# EAGLE board Z05_C6V_01 (EAGLE 6.3)
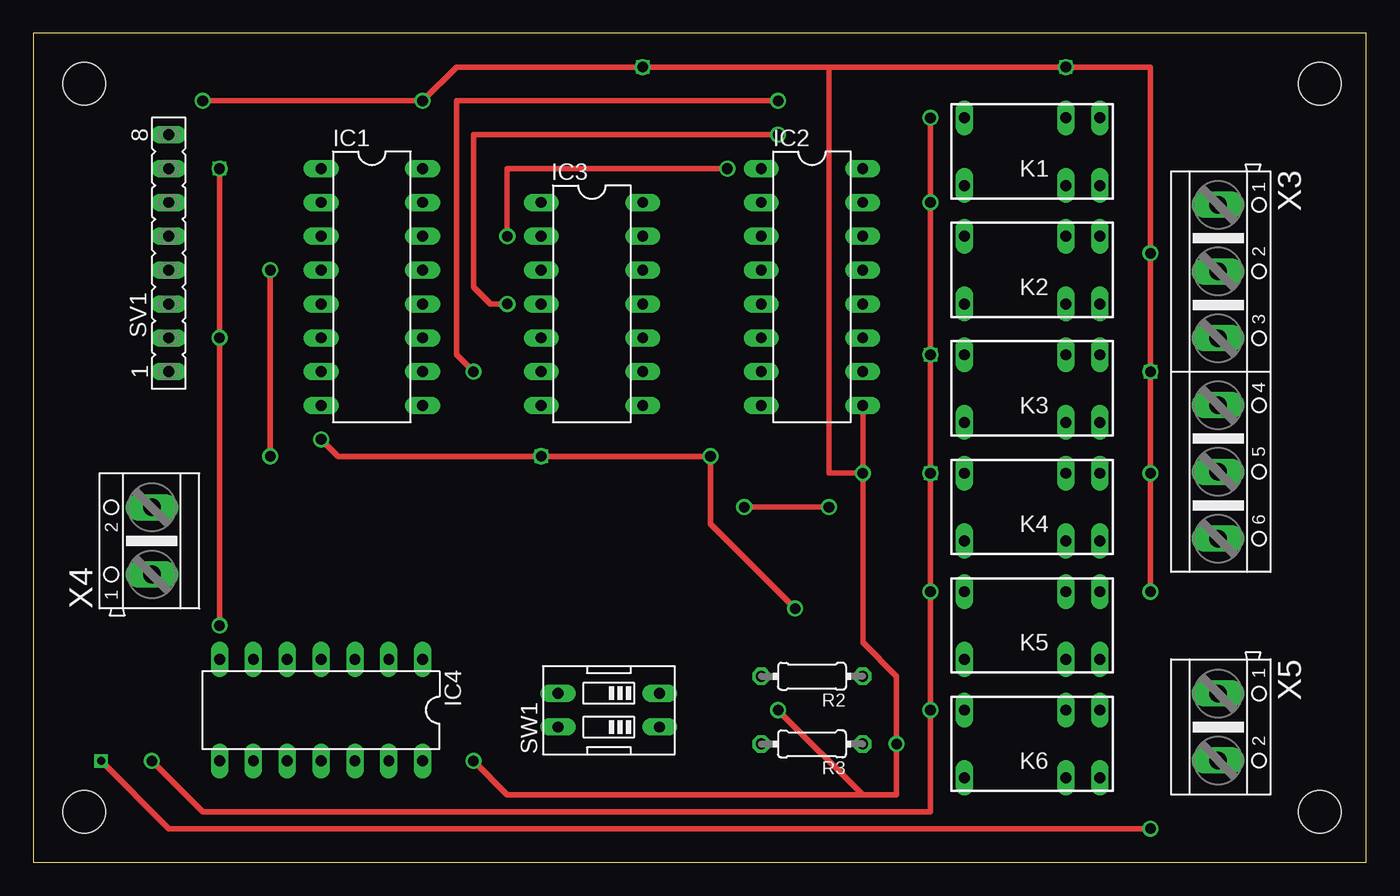
[diagram p0: board, top side]
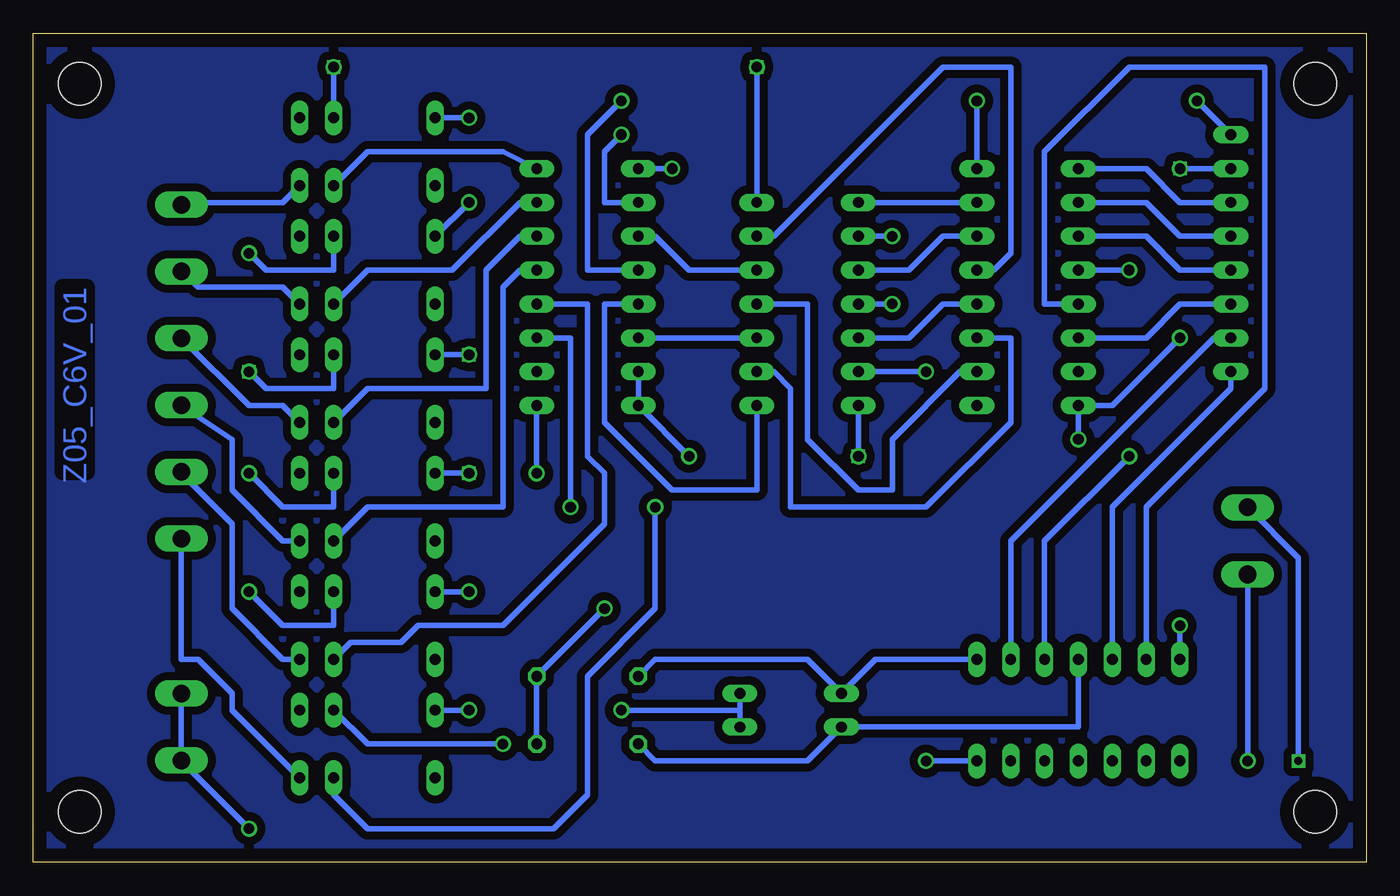
[diagram p1: board, bottom side, seen from below]

Size 100 x 62.22 mm. Coordinates in mm from the lower left corner, seen from the top.
Outline: 0,0 100,0 100,62.22 0,62.22 0,0
Copper layers (1*16): Top 0.035mm / dielectric 1.5mm / Bottom 0.035mm
Design rules "default *": minimum track width 16mil, minimum drill 24mil, track to track 24mil, track to pad 24mil, pad to pad 24mil, via to via 24mil, smd to smd 8mil, copper to edge 40mil, drill to drill 24mil, minimum pad ring 10mil, minimum via ring 8mil, stop-mask expansion 4mil, vias tented up to drill 0mil, thermal gap 10mil
Holes 3.2 mm at 3.81,58.42 96.52,58.42 3.81,3.81 96.52,3.81

## Footprints (pad centres in the part's own frame; a part is rotated, then mirrored left to right if it is on the bottom)
DIL16 = drill 0.813 long: 1 -8.89,-3.81; 2 -6.35,-3.81; 3 -3.81,-3.81; 4 -1.27,-3.81; 5 1.27,-3.81; 6 3.81,-3.81; 7 6.35,-3.81; 8 8.89,-3.81; 9 8.89,3.81; 10 6.35,3.81; 11 3.81,3.81; 12 1.27,3.81; 13 -1.27,3.81; 14 -3.81,3.81; 15 -6.35,3.81; 16 -8.89,3.81
DIL14 = drill 0.813 long: 1 -7.62,-3.81; 2 -5.08,-3.81; 3 -2.54,-3.81; 4 0,-3.81; 5 2.54,-3.81; 6 5.08,-3.81; 7 7.62,-3.81; 8 7.62,3.81; 9 5.08,3.81; 10 2.54,3.81; 11 0,3.81; 12 -2.54,3.81; 13 -5.08,3.81; 14 -7.62,3.81
G5V1 = drill 0.813 long: 1 -5.08,-2.54; 2 -2.54,-2.54; 5 5.08,-2.54; 6 5.08,2.54; 9 -2.54,2.54; 10 -5.08,2.54
0204/7 = drill 0.813 octagon: 1 -3.81,0; 2 3.81,0
FE08 = drill 0.813 long: 1 -8.89,0; 2 -6.35,0; 3 -3.81,0; 4 -1.27,0; 5 1.27,0; 6 3.81,0; 7 6.35,0; 8 8.89,0
EDG-02 = drill 0.813 long: 1 -1.27,-3.81; 2 1.27,-3.81; 3 1.27,3.81; 4 -1.27,3.81
AK500/6 = drill 1.321 long: 1 -12.522,0; 2 -7.518,0; 3 -2.515,0; 4 2.515,0; 5 7.518,0; 6 12.522,0
AK500/2 = drill 1.321 long: 1 -2.515,0; 2 2.515,0

## Placement (x,y rotation side)
IC1  74LS138N  [DIL16]  25.4,43.18 270 top
IC2  ULN2003AN  [DIL16]  58.42,43.18 270 top
IC3  74LS04N  [DIL14]  41.91,41.91 270 top
IC4  74LS86N  [DIL14]  21.59,11.43 180 top
K1  G5V1  [G5V1]  74.93,53.34 180 top
K2  G5V1  [G5V1]  74.93,44.45 180 top
K3  G5V1  [G5V1]  74.93,35.56 180 top
K4  G5V1  [G5V1]  74.93,26.67 180 top
K5  G5V1  [G5V1]  74.93,17.78 180 top
K6  G5V1  [G5V1]  74.93,8.89 180 top
R2  1K  [0204/7]  58.42,13.97 180 top
R3  1K  [0204/7]  58.42,8.89 180 top
SV1  Logic  [FE08]  10.16,45.72 90 top
SW1  BOARD SELECTOR  [EDG-02]  43.18,11.43 90 top
X3  Valves Control  [AK500/6]  88.9,36.83 270 top
X4  24VAC  [AK500/2]  8.89,24.13 90 top
X5  AC Common  [AK500/2]  88.9,10.16 270 top

## Library data of the parts
IC1 IC3 IC4 = 74xx-eu
IC2 = uln-udn
K1-K6 = relay; MPN: G5V-1-DC24; OC_FARNELL: 9949593; OC_NEWARK: 36M6377
R2 R3 = rcl
SV1 = con-lsta; OC_FARNELL: unknown; OC_NEWARK: unknown
SW1 = special
X3-X5 = con-ptr500; OC_FARNELL: unknown; OC_NEWARK: unknown

## Nets
GND: IC1.8 IC2.7 IC2.8 IC3.7 IC4.7 R2.1 R3.1 SV1.7
N$1: IC2.15 K2.9
N$2: IC1.15 IC3.1
N$3: IC1.14 IC3.3
N$4: IC1.13 IC3.13
N$5: IC1.12 IC3.5
N$6: IC1.11 IC3.9
N$7: IC1.10 IC3.11
N$8: K1.5 K2.5 K3.5 K4.5 K5.5 K6.5 X4.1
N$9: IC4.2 SV1.2
N$10: X4.2 X5.1 X5.2
N$11: K1.10 X3.1
N$12: K2.10 X3.2
N$13: K3.10 X3.3
N$14: K4.10 X3.4
N$15: K5.10 X3.5
N$16: K6.10 X3.6
N$19: IC4.5 SV1.1
N$21: IC2.16 K1.9
N$24: IC2.14 K3.9
N$25: IC2.13 K4.9
N$26: IC2.12 K5.9
N$27: IC2.11 K6.9
N$30: IC4.4 R3.2 SW1.4
N$31: IC1.4 IC4.3
N$32: IC1.5 IC4.6
N$33: IC4.1 R2.2 SW1.3
N$35: IC2.1 IC3.2
N$36: IC2.2 IC3.4
N$37: IC2.4 IC3.6
N$38: IC2.5 IC3.8
N$39: IC2.6 IC3.10
N$40: IC2.3 IC3.12
N$42: IC1.1 SV1.6
N$43: IC1.2 SV1.5
N$44: IC1.3 SV1.4
N$45: IC1.6 SV1.3
VCC: IC1.16 IC2.9 IC3.14 IC4.14 K1.2 K2.2 K3.2 K4.2 K5.2 K6.2 SV1.8 SW1.1 SW1.2

## Tracks (layer width: path | path; a pad name or v marks a point on that pad's centre or on a via)
GND  (via drill 0.6, 0.8)
  Top 0.406: v21.59,31.75 22.86,30.48 v38.1,30.48 v50.8,30.48 50.8,25.4 v57.15,19.05 | v13.97,17.78 v13.97,39.37 v13.97,52.07
  Bottom 0.406: R3.1 R2.1 v57.15,19.05 | IC2.7 IC2.8 v50.8,30.48 | v21.59,31.75 IC1.8 19.05,34.29 v13.97,39.37 | IC3.7 v38.1,30.48 | v13.97,17.78 IC4.7 | v13.97,52.07 SV1.7
N$1
  Bottom 0.406: IC2.15 63.5,49.53 68.58,44.45 74.93,44.45 K2.9
N$2
  Bottom 0.406: IC3.1 IC1.15
N$3
  Bottom 0.406: IC1.14 31.75,46.99 34.29,44.45 IC3.3
N$4
  Bottom 0.406: IC1.13 27.94,44.45 26.67,45.72 26.67,59.69 31.75,59.69 44.45,46.99 IC3.13
N$5
  Bottom 0.406: IC1.12 31.75,41.91 34.29,39.37 IC3.5
N$6
  Bottom 0.406: IC3.9 44.45,36.83 43.18,35.56 43.18,26.67 33.02,26.67 26.67,33.02 26.67,39.37 IC1.11
N$7
  Bottom 0.406: IC1.10 30.48,36.83 35.56,31.75 35.56,27.94 38.1,27.94 41.91,31.75 41.91,41.91 IC3.11
N$8  (via drill 0.6, 0.8)
  Top 0.406: v67.31,55.88 v67.31,49.53 v67.31,38.1 v67.31,29.21 v67.31,20.32 v67.31,11.43 67.31,3.81 12.7,3.81 v8.89,7.62
  Bottom 0.406: K2.5 v67.31,49.53 | v67.31,55.88 K1.5 | v67.31,11.43 K6.5 | K5.5 v67.31,20.32 | v67.31,38.1 K3.5 | K4.5 v67.31,29.21 | v8.89,7.62 X4.1
N$9
  Bottom 0.406: SV1.2 11.43,39.37 26.67,24.13 IC4.2
N$10  (via drill 0.6, 0.8)
  Top 0.406: v5.08,7.62 10.16,2.54 v83.82,2.54
  Bottom 0.406: v5.08,7.62 5.08,22.86 8.89,26.67 X4.2 | v83.82,2.54 88.9,7.62 X5.2 X5.1 88.9,12.7
N$11
  Bottom 0.406: K1.10 81.28,49.53 88.9,49.53 X3.1
N$12
  Bottom 0.406: K2.10 81.28,43.18 87.63,43.18 88.9,44.45 X3.2
N$13
  Bottom 0.406: K3.10 81.28,34.29 83.82,34.29 88.9,39.37 X3.3
N$14
  Bottom 0.406: K4.10 81.28,24.13 85.09,27.94 85.09,31.75 88.9,34.29 X3.4
N$15
  Bottom 0.406: K5.10 81.28,15.24 85.09,19.05 85.09,25.4 88.9,29.21 X3.5
N$16
  Bottom 0.406: K6.10 85.09,11.43 85.09,12.7 87.63,15.24 88.9,15.24 X3.6
N$17
  pour Bottom: 0,0 0,62.23 100.33,62.23 100.33,0
N$19
  Bottom 0.406: SV1.1 10.16,35.56 19.05,26.67 IC4.5
N$21
  Bottom 0.406: K1.9 74.93,53.34 64.77,53.34 IC2.16
N$24
  Bottom 0.406: IC2.14 63.5,46.99 66.04,44.45 66.04,35.56 74.93,35.56 K3.9
N$25
  Bottom 0.406: K4.9 74.93,26.67 64.77,26.67 64.77,43.18 63.5,44.45 IC2.13
N$26
  Bottom 0.406: K5.9 76.2,16.51 72.39,16.51 71.12,17.78 64.77,17.78 57.15,25.4 57.15,29.21 58.42,30.48 58.42,41.91 IC2.12
N$27  (via drill 0.8)
  Top 0.406: v59.69,26.67 v53.34,26.67
  Bottom 0.406: IC2.11 59.69,39.37 v59.69,26.67 | v53.34,26.67 53.34,19.05 58.42,13.97 58.42,5.08 60.96,2.54 74.93,2.54 77.47,5.08 K6.9
N$30
  Bottom 0.406: R3.2 53.34,7.62 41.91,7.62 SW1.4 21.59,10.16 IC4.4
N$31  (via drill 0.8)
  Top 0.406: v17.78,44.45 v17.78,30.48
  Bottom 0.406: IC1.4 v17.78,44.45 | v17.78,30.48 24.13,24.13 IC4.3
N$32
  Bottom 0.406: IC4.6 16.51,26.67 7.62,35.56 7.62,59.69 17.78,59.69 24.13,53.34 24.13,41.91 IC1.5
N$33
  Bottom 0.406: R2.2 53.34,15.24 41.91,15.24 SW1.3 36.83,15.24 IC4.1
N$35  (via drill 0.8)
  Top 0.406: v35.56,46.99 35.56,52.07 v52.07,52.07
  Bottom 0.406: IC3.2 v35.56,46.99 | v52.07,52.07 IC2.1
N$36  (via drill 0.8)
  Top 0.406: v35.56,41.91 34.29,41.91 33.02,43.18 33.02,54.61 v55.88,54.61
  Bottom 0.406: IC3.4 v35.56,41.91 | v55.88,54.61 57.15,53.34 57.15,49.53 IC2.2
N$37  (via drill 0.8)
  Top 0.406: v33.02,36.83 31.75,38.1 31.75,57.15 v55.88,57.15
  Bottom 0.406: IC3.6 v33.02,36.83 | v55.88,57.15 58.42,54.61 58.42,44.45 IC2.4
N$38
  Bottom 0.406: IC3.8 45.72,27.94 52.07,27.94 57.15,33.02 57.15,41.91 IC2.5
N$39
  Bottom 0.406: IC2.6 IC3.10
N$40
  Bottom 0.406: IC3.12 50.8,44.45 53.34,46.99 IC2.3
N$42
  Bottom 0.406: SV1.6 13.97,49.53 16.51,52.07 IC1.1
N$43
  Bottom 0.406: SV1.5 13.97,46.99 16.51,49.53 IC1.2
N$44
  Bottom 0.406: SV1.4 13.97,44.45 16.51,46.99 IC1.3
N$45
  Bottom 0.406: SV1.3 13.97,41.91 16.51,39.37 IC1.6
VCC  (via drill 0.6, 0.8, 0.8 pad 0.81)
  Top 0.406: 62.23,5.08 64.77,5.08 v64.77,8.89 64.77,13.97 62.23,16.51 v62.23,29.21 | 62.23,5.08 35.56,5.08 v33.02,7.62 | v62.23,29.21 IC2.9 | 62.23,5.08 v55.88,11.43 | v83.82,20.32 v83.82,29.21 v83.82,36.83 v83.82,45.72 83.82,59.69 v77.47,59.69 59.69,59.69 | 59.69,59.69 v45.72,59.69 31.75,59.69 v29.21,57.15 v12.7,57.15 | 59.69,59.69 59.69,29.21 v62.23,29.21
  Bottom 0.406: SW1.2 46.99,11.43 | 46.99,11.43 SW1.1 | v33.02,7.62 IC4.14 | v64.77,8.89 74.93,8.89 K6.2 | v55.88,11.43 46.99,11.43 | K5.2 77.47,17.78 81.28,17.78 v83.82,20.32 | K4.2 77.47,26.67 81.28,26.67 v83.82,29.21 | K3.2 77.47,35.56 82.55,35.56 v83.82,36.83 | v45.72,59.69 IC3.14 | IC1.16 v29.21,57.15 | v77.47,59.69 K1.2 | v62.23,29.21 IC2.9 | v12.7,57.15 SV1.8 | K2.2 77.47,44.45 82.55,44.45 v83.82,45.72

## Text on the board
Bottom: Z05_C6V_01